# EAGLE board SparkFun_Tsunami_Qwiic-Panel_v22 (EAGLE 9.6.2), part 1 of 7
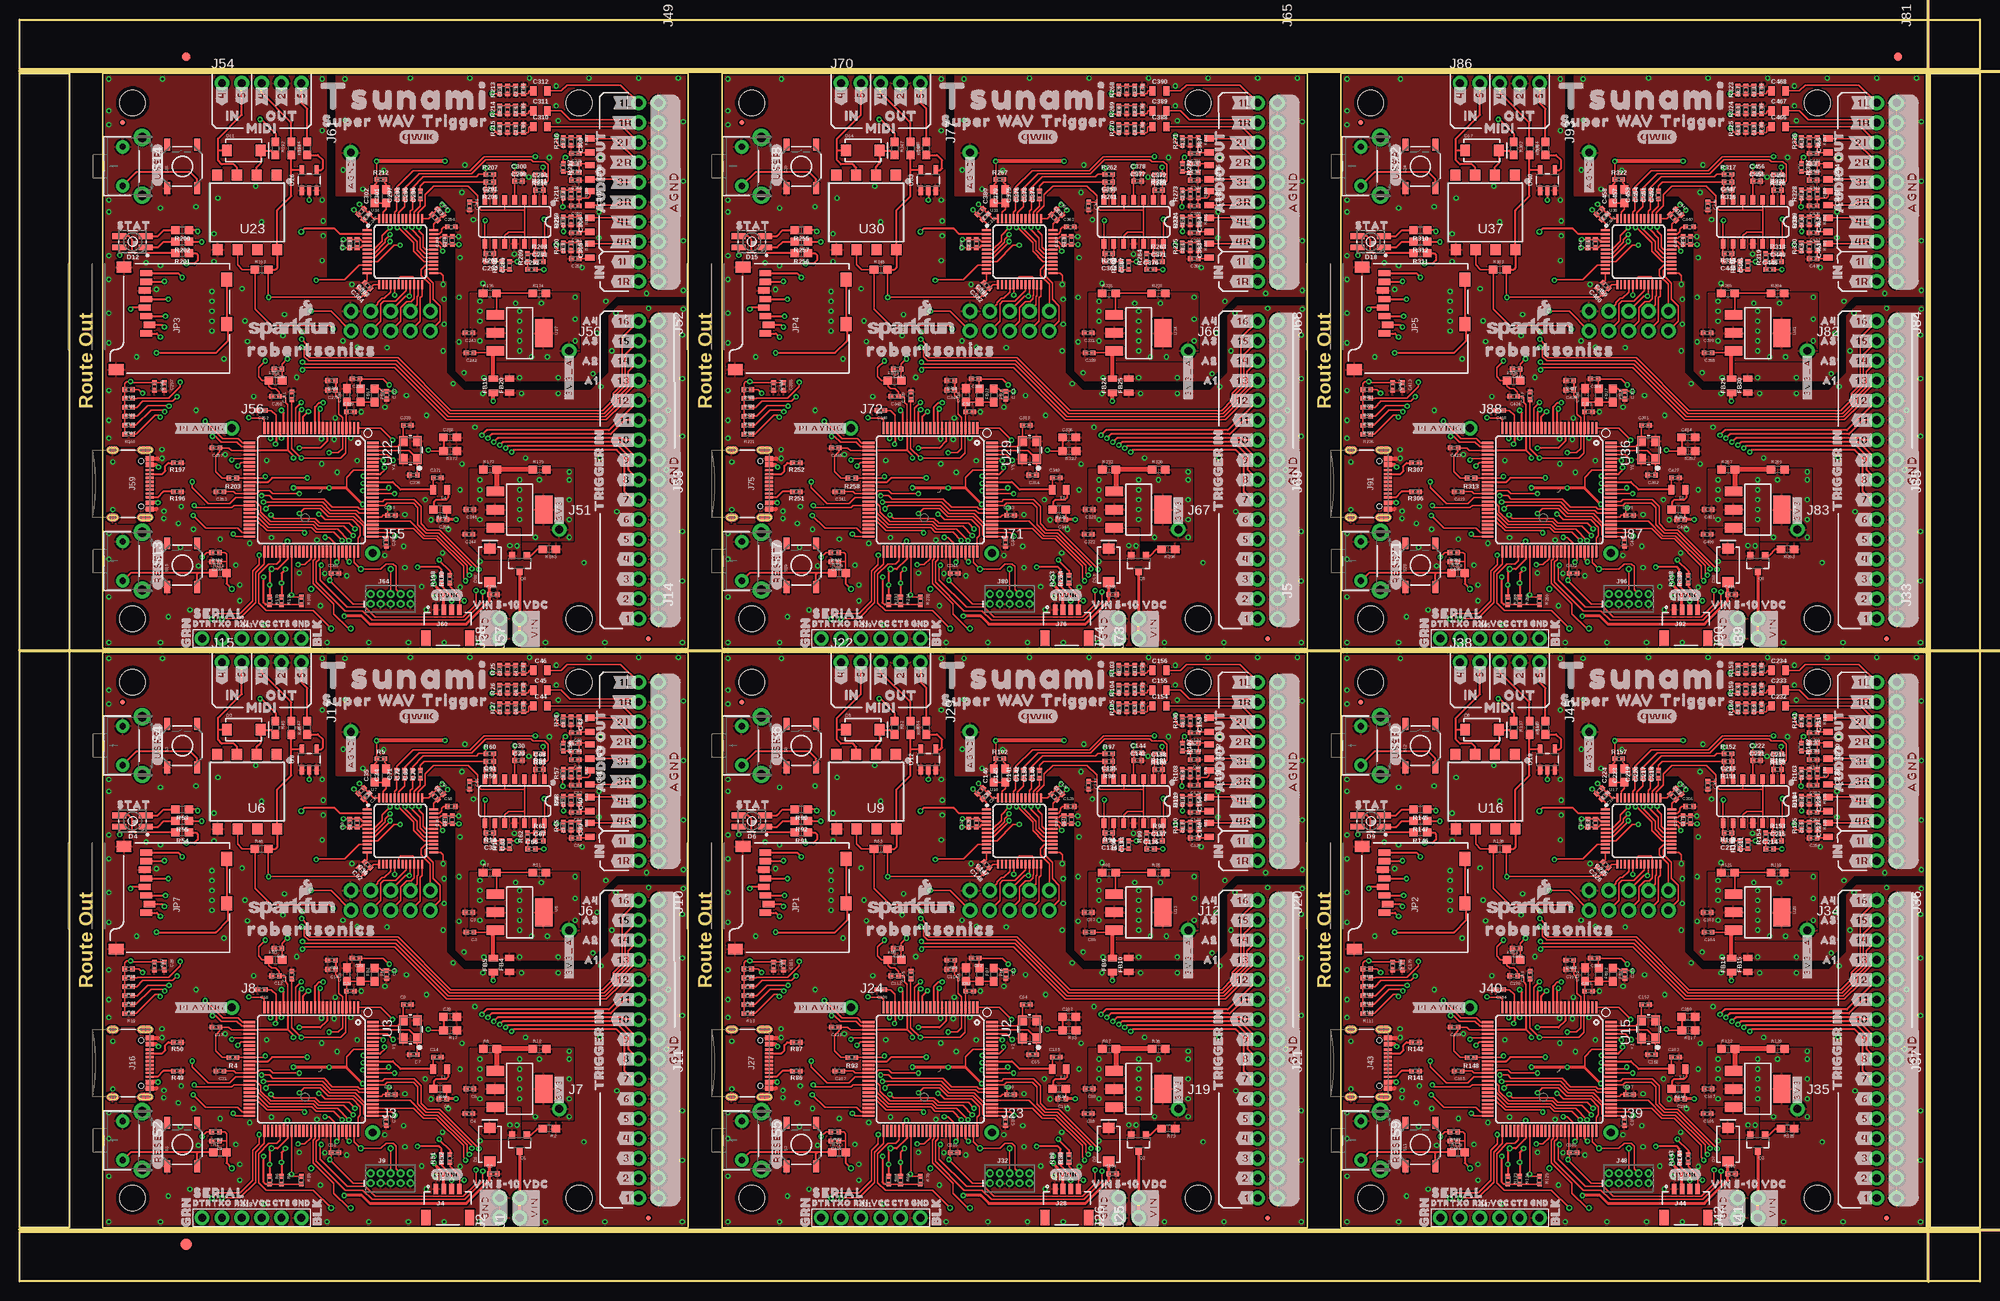
[diagram p0: board, top side]
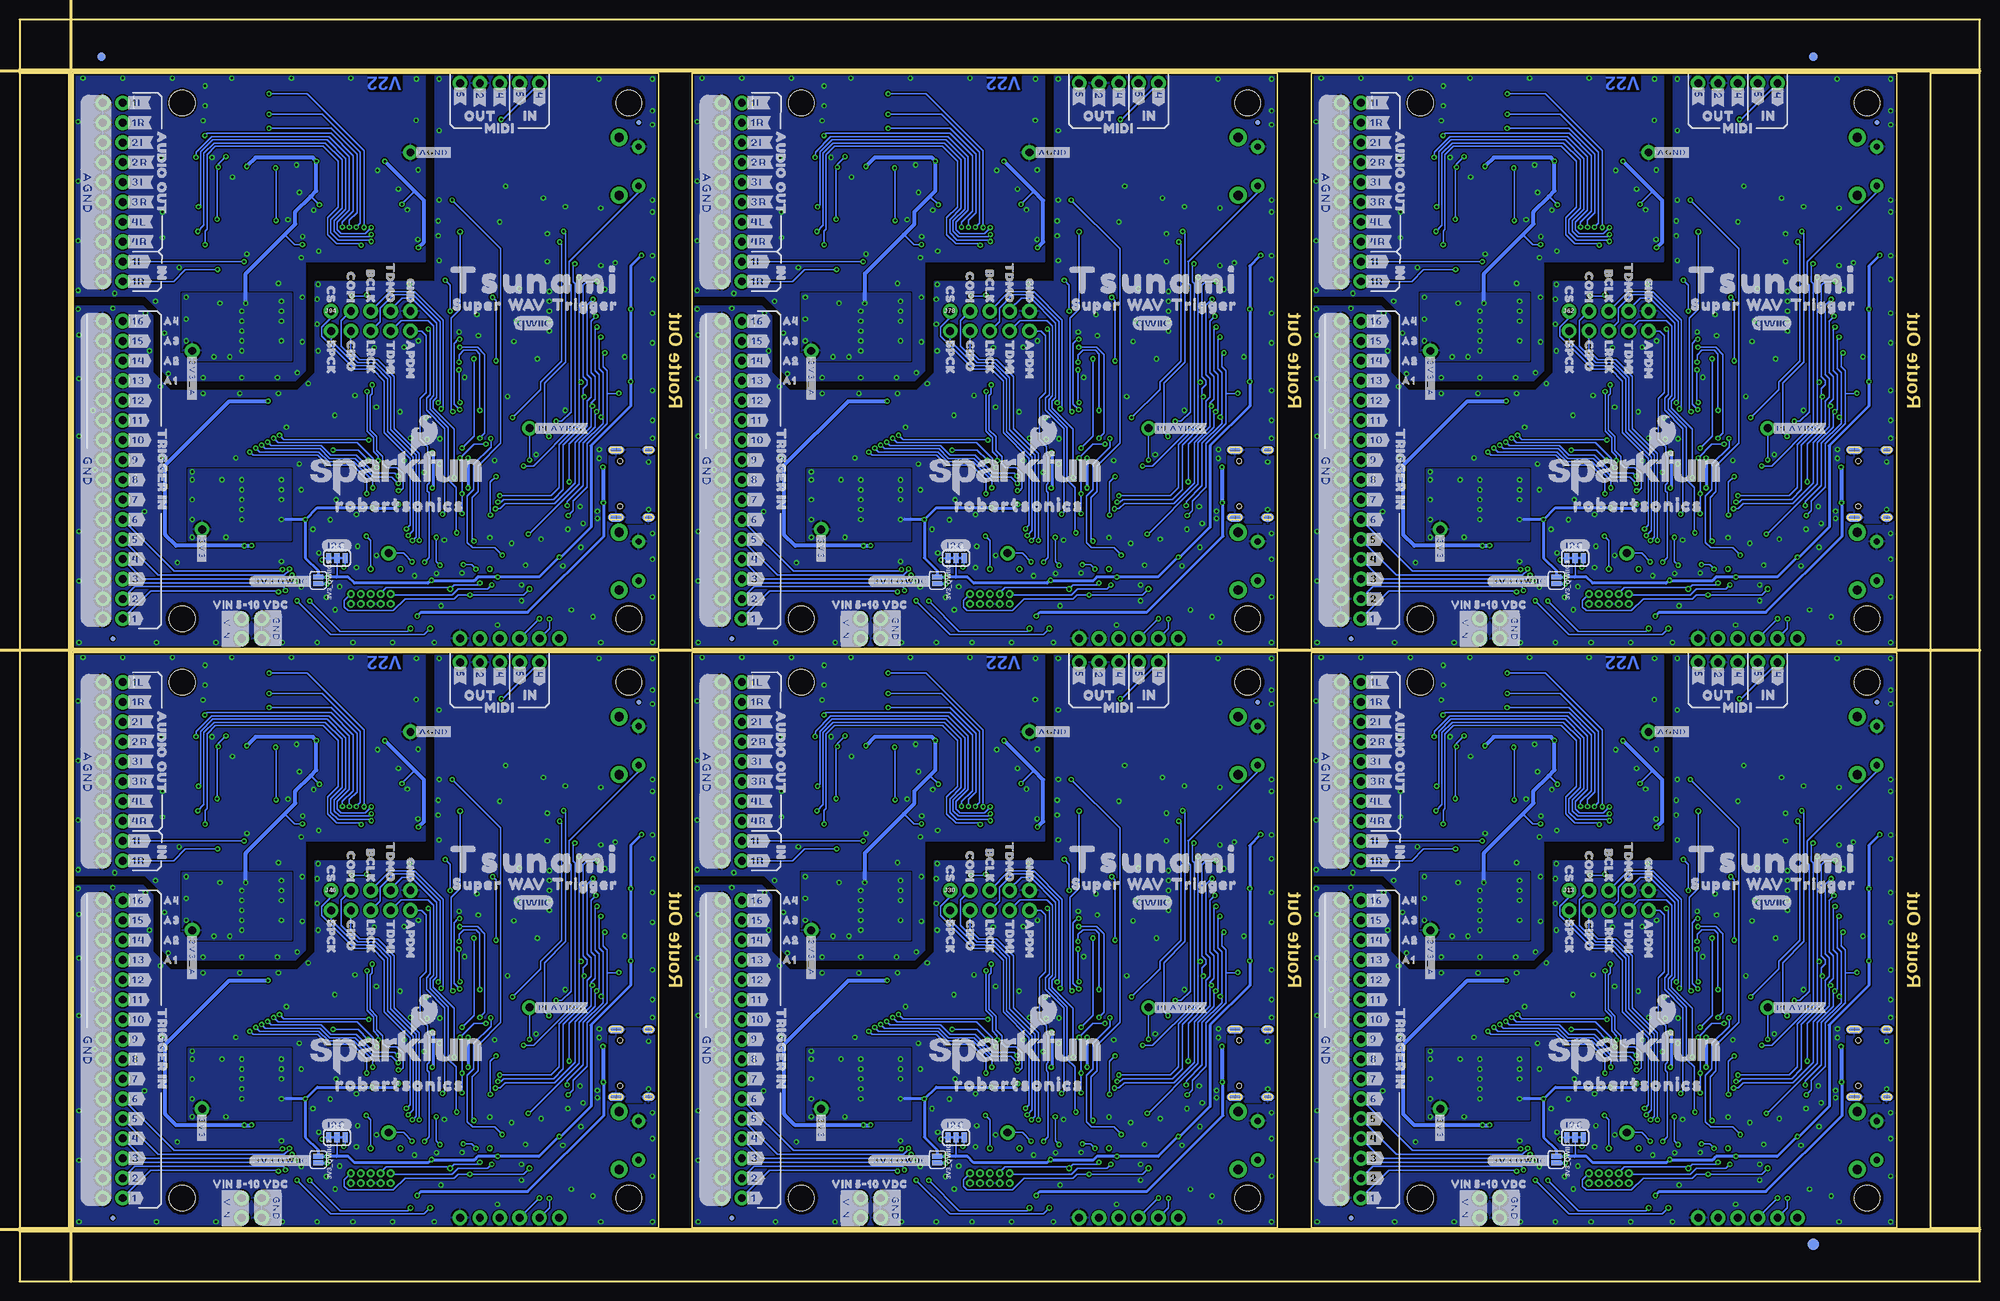
[diagram p1: board, bottom side, seen from below]

Size 250.95 x 161.54 mm. Coordinates in mm from the lower left corner, seen from the top.
Outline: 10.67,6.86 85.6,6.86 85.6,80.52 10.67,80.52 10.67,6.86
Outline: 89.92,6.86 164.85,6.86 164.85,80.52 89.92,80.52 89.92,6.86
Outline: 169.16,6.86 244.09,6.86 244.09,80.52 169.16,80.52 169.16,6.86
Outline: 10.67,81.03 85.6,81.03 85.6,154.69 10.67,154.69 10.67,81.03
Outline: 89.92,81.03 164.85,81.03 164.85,154.69 89.92,154.69 89.92,81.03
Outline: 169.16,81.03 244.09,81.03 244.09,154.69 169.16,154.69 169.16,81.03
Outline: 0,6.35 250.95,6.35 250.95,0 0,0 0,6.35
Outline: 244.6,154.69 250.95,154.69 250.95,6.86 244.6,6.86 244.6,154.69
Outline: 0,161.54 250.95,161.54 250.95,155.19 0,155.19 0,161.54
Outline: 0,154.69 6.35,154.69 6.35,6.86 0,6.86 0,154.69
Copper layers (1*16): Top 0.035mm / dielectric 1.5mm / Bottom 0.035mm
Design rules "SparkFun_Tsunami_Qwiic": minimum track width 7mil, minimum drill 0.3mm, track to track 7mil, track to pad 7mil, pad to pad 7mil, via to via 7mil, smd to smd 7mil, copper to edge 7mil, drill to drill 7mil, minimum pad ring 7mil, minimum via ring 7mil, stop-mask expansion 3mil, vias tented up to drill 25mil, thermal gap 10mil
tRestrict: area 40,34.7 to 40.1,35.4; area 40.5,34.7 to 40.6,35.4; area 119.3,34.7 to 119.4,35.4; area 119.8,34.7 to 119.9,35.4; area 198.5,34.7 to 198.6,35.4; area 199,34.7 to 199.1,35.4; area 40,108.8 to 40.1,109.6; area 40.5,108.8 to 40.6,109.6; area 119.3,108.8 to 119.4,109.6; area 119.8,108.8 to 119.9,109.6; area 198.5,108.8 to 198.6,109.6; area 199,108.8 to 199.1,109.6
Milling: 4 lines

## Footprints (pad centres in the part's own frame; a part is rotated, then mirrored left to right if it is on the bottom)
SMT-JUMPER_2_NO_SILK = smd 0.635 x 1.27: 1 -0.406,0; 2 0.406,0
0402-TIGHT = smd 0.6 x 0.6: 1 -0.5,0; 2 0.5,0
0603 = smd 1.1 x 1: 1 -0.85,0; 2 0.85,0
0805 = smd 0.8 x 1.2: 1 -0.9,0; 2 0.9,0
SMA-DIODE = smd 1.27 x 1.47: A -2.15,0; C 2.15,0
P-LCC-4-3 = smd 1.8 x 0.75: 1 -1.7,0.725; 2 -1.7,-0.725; 3 1.7,-0.725; 4 1.7,0.725
FIDUCIAL-1X2 = smd 1 x 1: 1 0,0
FIDUCIAL-1.5X3 = smd 1.5 x 1.5: 1 0,0
FIDUCIAL-MICRO = smd 0.635 x 0.635: 1 0,0
STAND-OFF = hole 3.302: 0,0
SMT-JUMPER_3_2-NC_TRACE_SILK = smd 0.66 x 1.27: 1 -1.041,0; 2 0,0; 3 1.041,0
1X02_NO_SILK = drill 1.016 pad 1.88: 1 0,0; 2 2.54,0
1X01_NO_SILK = drill 1.016 pad 1.88: 1 0,0
JST04_1MM_RA = smd 0.6 x 1.35: 1 -1.5,0; 2 -0.5,0; 3 0.5,0; 4 1.5,0 | smd 1.2 x 2: NC1 2.8,-3.675; NC2 -2.8,-3.675
2X10_NOSILK = drill 1.016 pad 1.88: 1 0,0; 2 0,2.54; 3 2.54,0; 4 2.54,2.54; 5 5.08,0; 6 5.08,2.54; 7 7.62,0; 8 7.62,2.54; 9 10.16,0; 10 10.16,2.54; 11 12.7,0; 12 12.7,2.54; 13 15.24,0; 14 15.24,2.54; 15 17.78,0; 16 17.78,2.54; 17 20.32,0; 18 20.32,2.54; 19 22.86,0; 20 22.86,2.54
2X5-PTH-1.27MM-NO_SILK = drill 0.508 pad 1: 1 -2.54,-0.635; 2 -2.54,0.635; 3 -1.27,-0.635; 4 -1.27,0.635; 5 0,-0.635; 6 0,0.635; 7 1.27,-0.635; 8 1.27,0.635; 9 2.54,-0.635; 10 2.54,0.635
2X8_NOSILK = drill 1.016 pad 1.88: 1 0,0; 2 0,2.54; 3 2.54,0; 4 2.54,2.54; 5 5.08,0; 6 5.08,2.54; 7 7.62,0; 8 7.62,2.54; 9 10.16,0; 10 10.16,2.54; 11 12.7,0; 12 12.7,2.54; 13 15.24,0; 14 15.24,2.54; 15 17.78,0; 16 17.78,2.54
2X5_NOSILK = drill 1.016 pad 1.88: 1 0,0; 2 0,2.54; 3 2.54,0; 4 2.54,2.54; 5 5.08,0; 6 5.08,2.54; 7 7.62,0; 8 7.62,2.54; 9 10.16,0; 10 10.16,2.54
1X05_NO_SILK = drill 1.016 pad 1.88: 1 0,0; 2 2.54,0; 3 5.08,0; 4 7.62,0; 5 10.16,0
USB-C-16P-4LAYER-ISOLATED = smd 0.3 x 1: A5 -1.25,-0.34; A6 -0.25,-0.34; A7 0.25,-0.34; A8 1.25,-0.34; B5 1.75,-0.34; B6 0.75,-0.34; B7 -0.75,-0.34; B8 -1.75,-0.34 | smd 0.6 x 1: GND -3.225,-0.34; GND2 3.225,-0.34; VBUS1 -2.45,-0.34; VBUS2 2.45,-0.34 | smd 1 x 2.1: SHLD1 -4.32,-0.915; SHLD2 4.32,-0.915 | smd 1 x 2.1 bottom: SHLD3 -4.32,-0.915; SHLD4 4.32,-0.915 | smd 1 x 1.6: SHLD5 -4.32,-5.095; SHLD8 4.32,-5.095 | smd 1 x 1.6 bottom: SHLD6 -4.32,-5.095; SHLD7 4.32,-5.095 | hole 0.65: -2.89,-1.445; 2.89,-1.445
6_PIN_SERIAL_TARGET_SIDE_W_SILK = drill 1.016 pad 1.88: 1 -6.35,0; 2 -3.81,0; 3 -1.27,0; 4 1.27,0; 5 3.81,0; 6 6.35,0
MICRO-SD-SOCKET-PP = smd 1.8 x 1.4: CD1 -2.05,0.4; CD2 -7.75,0.4 | smd 0.8 x 1.5: CS -7.84,10.3; DI -6.74,10.7; DO -2.34,10.7; GND -3.44,10.9; RSV1 -8.94,10.7; RSV2 -1.24,10.7; SCLK -4.54,10.7; VCC -5.64,10.9 | smd 1.4 x 1.9: GND1 -13.6,14.55; GND3 -0.45,13.55
SOT23-3 = smd 0.8 x 0.9: 1 -0.95,-1; 2 0.95,-1; 3 0,1.1
TACTILE_SWITCH_SMD_5.2MM = smd 1.524 x 0.762: 1 -2.794,1.905; 2 2.794,1.905; 3 -2.794,-1.905; 4 2.794,-1.905
TACTILE_SWITCH_PTH_RIGHT_ANGLE = drill 0.8 pad 1.7: 1 -2.5,0; 2 2.5,0 | drill 1.2 pad 2.2: ANCHOR1 -3.703,2.5; ANCHOR2 3.703,2.5
TP_15TH = drill 0.381 pad 0.61: 1 0,0
SOT223 = smd 1.219 x 2.235: 1 -2.311,-3.099; 2 0,-3.099; 3 2.311,-3.099 | smd 3.6 x 2.2: 4 0,3.099
LQFP100 = smd 1.5 x 0.28: 1 -7.9,6; 2 -7.9,5.5; 3 -7.9,5; 4 -7.9,4.5; 5 -7.9,4; 6 -7.9,3.5; 7 -7.9,3; 8 -7.9,2.5; 9 -7.9,2; 10 -7.9,1.5; 11 -7.9,1; 12 -7.9,0.5; 13 -7.9,0; 14 -7.9,-0.5; 15 -7.9,-1; 16 -7.9,-1.5; 17 -7.9,-2; 18 -7.9,-2.5; 19 -7.9,-3; 20 -7.9,-3.5; 21 -7.9,-4; 22 -7.9,-4.5; 23 -7.9,-5; 24 -7.9,-5.5; 25 -7.9,-6; 51 7.9,-6; 52 7.9,-5.5; 53 7.9,-5; 54 7.9,-4.5; 55 7.9,-4; 56 7.9,-3.5; 57 7.9,-3; 58 7.9,-2.5; 59 7.9,-2; 60 7.9,-1.5; 61 7.9,-1; 62 7.9,-0.5; 63 7.9,0; 64 7.9,0.5; 65 7.9,1; 66 7.9,1.5; 67 7.9,2; 68 7.9,2.5; 69 7.9,3; 70 7.9,3.5; 71 7.9,4; 72 7.9,4.5; 73 7.9,5; 74 7.9,5.5; 75 7.9,6 | smd 0.28 x 1.5: 26 -6,-7.9; 27 -5.5,-7.9; 28 -5,-7.9; 29 -4.5,-7.9; 30 -4,-7.9; 31 -3.5,-7.9; 32 -3,-7.9; 33 -2.5,-7.9; 34 -2,-7.9; 35 -1.5,-7.9; 36 -1,-7.9; 37 -0.5,-7.9; 38 0,-7.9; 39 0.5,-7.9; 40 1,-7.9; 41 1.5,-7.9; 42 2,-7.9; 43 2.5,-7.9; 44 3,-7.9; 45 3.5,-7.9; 46 4,-7.9; 47 4.5,-7.9; 48 5,-7.9; 49 5.5,-7.9; 50 6,-7.9; 76 6,7.9; 77 5.5,7.9; 78 5,7.9; 79 4.5,7.9; 80 4,7.9; 81 3.5,7.9; 82 3,7.9; 83 2.5,7.9; 84 2,7.9; 85 1.5,7.9; 86 1,7.9; 87 0.5,7.9; 88 0,7.9; 89 -0.5,7.9; 90 -1,7.9; 91 -1.5,7.9; 92 -2,7.9; 93 -2.5,7.9; 94 -3,7.9; 95 -3.5,7.9; 96 -4,7.9; 97 -4.5,7.9; 98 -5,7.9; 99 -5.5,7.9; 100 -6,7.9
SO14 = smd 0.6 x 1.2: 1 -3.175,-2.8; 2 -1.905,-2.8; 3 -0.635,-2.8; 4 0.635,-2.8; 5 1.905,-2.8; 6 3.175,-2.8; 7 4.445,-2.8; 8 4.445,2.8; 9 3.175,2.8; 10 1.905,2.8; 11 0.635,2.8; 12 -0.635,2.8; 13 -1.905,2.8; 14 -3.175,2.8
8-SMD = smd 1.3 x 1.4: 1 -3.96,-4.96; 2 -1.42,-4.96; 3 1.12,-4.96; 4 3.66,-4.96; 5 3.59,4.58; 6 1.05,4.58; 7 -1.49,4.58; 8 -4.03,4.58
LQFP-48 = smd 1.143 x 0.254: 1 -4.25,2.75; 2 -4.25,2.25; 3 -4.25,1.75; 4 -4.25,1.25; 5 -4.25,0.75; 6 -4.25,0.25; 7 -4.25,-0.25; 8 -4.25,-0.75; 9 -4.25,-1.25; 10 -4.25,-1.75; 11 -4.25,-2.25; 12 -4.25,-2.75; 25 4.25,-2.75; 26 4.25,-2.25; 27 4.25,-1.75; 28 4.25,-1.25; 29 4.25,-0.75; 30 4.25,-0.25; 31 4.25,0.25; 32 4.25,0.75; 33 4.25,1.25; 34 4.25,1.75; 35 4.25,2.25; 36 4.25,2.75 | smd 0.254 x 1.143: 13 -2.75,-4.25; 14 -2.25,-4.25; 15 -1.75,-4.25; 16 -1.25,-4.25; 17 -0.75,-4.25; 18 -0.25,-4.25; 19 0.25,-4.25; 20 0.75,-4.25; 21 1.25,-4.25; 22 1.75,-4.25; 23 2.25,-4.25; 24 2.75,-4.25; 37 2.75,4.25; 38 2.25,4.25; 39 1.75,4.25; 40 1.25,4.25; 41 0.75,4.25; 42 0.25,4.25; 43 -0.25,4.25; 44 -0.75,4.25; 45 -1.25,4.25; 46 -1.75,4.25; 47 -2.25,4.25; 48 -2.75,4.25
SOT23-5 = smd 0.55 x 1.2: 1 -0.95,-1.3; 2 0,-1.3; 3 0.95,-1.3; 4 0.95,1.3; 5 -0.95,1.3
CRYSTAL-SMD-3.2X2.5MM_GEYER_12.60421 = smd 1.3 x 1.1: 1 -1.15,-0.9; 2 1.15,-0.9; 3 1.15,0.9; 4 -1.15,0.9

## Placement (x,y rotation side)
3V3_QWIIC  [SMT-JUMPER_2_NO_SILK]  54.23,15.61 270 bottom
3V3_QWIIC1  [SMT-JUMPER_2_NO_SILK]  133.48,15.61 270 bottom
3V3_QWIIC2  [SMT-JUMPER_2_NO_SILK]  212.73,15.61 270 bottom
3V3_QWIIC3  [SMT-JUMPER_2_NO_SILK]  54.23,89.77 270 bottom
3V3_QWIIC4  [SMT-JUMPER_2_NO_SILK]  133.48,89.77 270 bottom
3V3_QWIIC5  [SMT-JUMPER_2_NO_SILK]  212.73,89.77 270 bottom
C1  10nF  [0402-TIGHT]  25.1,17.97 180 top
C2  10uF  [0402-TIGHT]  60.69,13.77 0 top
C3  0.1uF  [0402-TIGHT]  57.66,44.7 180 top
C4  0.1uF  [0402-TIGHT]  57.53,21.46 180 top
C5  10uF  [0402-TIGHT]  57.53,47.24 180 top
C6  10uF  [0402-TIGHT]  57.66,24.64 180 top
C7  12pF  [0402-TIGHT]  50.42,29.05 180 top
C8  0.1uF  [0402-TIGHT]  54.16,23.36 180 top
C9  12pF  [0402-TIGHT]  49.63,35.42 0 top
C10  0.1uF  [0402-TIGHT]  39.94,39.94 180 top
C11  10uF  [0402-TIGHT]  39.95,41.14 180 top
C12  0.1uF  [0402-TIGHT]  32.77,39.12 180 top
C13  0.1uF  [0402-TIGHT]  25.15,32.54 180 top
C14  4.7uF  [0402-TIGHT]  53.47,28.7 0 top
C15  0.1uF  [0402-TIGHT]  40.39,16.49 0 top
C16  0.1uF  [0402-TIGHT]  47.62,23.91 0 top
C17  0.1uF  [0402-TIGHT]  34.86,39.23 90 top
C18  0.1uF  [0402-TIGHT]  30.99,37.34 180 top
C19  0.1uF  [0402-TIGHT]  47.01,39.29 270 top
C20  10pF  [0603]  55.12,33.88 0 top
C21  0.1uF  [0402-TIGHT]  25.65,26.92 180 top
C22  0.1uF  [0402-TIGHT]  46.95,20.44 270 top
C23  0.1uF  [0402-TIGHT]  43.08,41.37 180 top
C24  0.1uF  [0402-TIGHT]  42.36,37.17 0 top
C25  2.2uF  [0603]  41.91,39.28 90 top
C26  0.1uF  [0402-TIGHT]  33.11,42.62 180 top
C27  10uF  [0402-TIGHT]  17.27,40.39 270 top
C28  0.1uF  [0402-TIGHT]  18.54,40.39 270 top
C29  0.1uF  [0402-TIGHT]  63.88,66.67 0 top
C30  1.0uF  [0402-TIGHT]  63.88,67.69 0 top
C31  0.1uF  [0402-TIGHT]  54.46,59.11 90 top
C32  1.0uF  [0402-TIGHT]  55.4,59.11 90 top
C33  100pF  [0402-TIGHT]  60.2,56.39 180 top
C34  5.6nF  [0603]  46.94,64.74 90 top
C35  390nF  [0603]  45.47,64.74 90 top
C36  0.1uF  [0402-TIGHT]  44.55,53.31 135 top
C37  0.1uF  [0402-TIGHT]  44.4,62.12 225 top
C38  1.0uF  [0402-TIGHT]  43.74,62.79 225 top
C39  22uF  [0805]  73.03,57.78 90 top
C40  22uF  [0805]  73.03,61.09 90 top
C41  22uF  [0805]  73.03,64.52 270 top
C42  22uF  [0805]  73.03,67.82 270 top
C43  22uF  [0805]  73.03,71.25 90 top
C44  22uF  [0805]  66.67,73.66 0 top
C45  22uF  [0805]  66.67,75.69 0 top
C46  22uF  [0805]  66.67,78.23 0 top
C47  0.1uF  [0402-TIGHT]  64.52,78.36 90 top
C48  0.1uF  [0402-TIGHT]  64.52,75.82 90 top
C49  0.1uF  [0402-TIGHT]  64.52,73.41 90 top
C50  0.1uF  [0402-TIGHT]  71.12,70.23 180 top
C51  0.1uF  [0402-TIGHT]  71.13,68.92 180 top
C52  0.1uF  [0402-TIGHT]  71.12,63.5 180 top
C53  0.1uF  [0402-TIGHT]  71.12,60.07 180 top
C54  0.1uF  [0402-TIGHT]  71.12,56.77 180 top
C55  0.1uF  [0402-TIGHT]  57.61,63.49 270 top
C56  0.1uF  [0402-TIGHT]  55.28,60.81 0 top
C57  0.1uF  [0402-TIGHT]  43.23,58.68 90 top
C58  1.0uF  [0402-TIGHT]  53.87,62.71 315 top
C59  0.1uF  [0402-TIGHT]  53.17,62.03 315 top
C60  1.0uF  [0402-TIGHT]  42.27,58.68 90 top
C61  100pF  [0402-TIGHT]  60.2,66.55 180 top
C62  1.0uF  [0402-TIGHT]  43.81,52.6 135 top
C63  1.0uF  [0402-TIGHT]  62.74,55.88 90 top
C64  12pF  [0402-TIGHT]  128.88,35.42 0 top
C65  12pF  [0402-TIGHT]  129.67,29.05 180 top
C66  1.0uF  [0402-TIGHT]  65.53,55.37 0 top
C67  100pF  [0402-TIGHT]  66.55,56.39 0 top
C68  100pF  [0402-TIGHT]  66.55,66.55 0 top
C69  1.0uF  [0402-TIGHT]  50.29,64.9 90 top
C70  1.0uF  [0402-TIGHT]  51.31,64.9 90 top
C71  1.0uF  [0402-TIGHT]  48.26,64.9 90 top
C72  1.0uF  [0402-TIGHT]  49.28,64.9 90 top
C73  0.1uF  [0402-TIGHT]  70.61,61.59 90 top
C74  0.1uF  [0402-TIGHT]  70.61,58.29 90 top
C75  0.1uF  [0402-TIGHT]  62.48,78.36 90 top
C76  0.1uF  [0402-TIGHT]  62.48,75.82 90 top
C77  0.1uF  [0402-TIGHT]  62.48,73.41 90 top
C78  0.1uF  [0402-TIGHT]  70.61,71.76 90 top
C79  0.1uF  [0402-TIGHT]  71.12,66.8 180 top
C80  0.1uF  [0402-TIGHT]  70.61,65.02 90 top
C81  0.1uF  [0402-TIGHT]  126.25,39.29 270 top
C82  0.1uF  [0402-TIGHT]  122.32,41.37 180 top
C83  0.1uF  [0402-TIGHT]  121.61,37.17 0 top
C84  2.2uF  [0603]  121.16,39.28 90 top
C85  10uF  [0402-TIGHT]  119.2,41.14 180 top
C86  0.1uF  [0402-TIGHT]  136.91,44.7 180 top
C87  10uF  [0402-TIGHT]  136.78,47.24 180 top
C88  0.1uF  [0402-TIGHT]  136.78,21.46 180 top
C89  10uF  [0402-TIGHT]  136.91,24.64 180 top
C90  10uF  [0402-TIGHT]  96.52,40.39 270 top
C91  0.1uF  [0402-TIGHT]  123.65,62.12 225 top
C92  1.0uF  [0402-TIGHT]  122.99,62.79 225 top
C93  0.1uF  [0402-TIGHT]  133.71,59.11 90 top
C94  1.0uF  [0402-TIGHT]  134.65,59.11 90 top
C95  0.1uF  [0402-TIGHT]  141.73,78.36 90 top
C96  0.1uF  [0402-TIGHT]  141.73,75.82 90 top
C97  0.1uF  [0402-TIGHT]  141.73,73.41 90 top
C98  0.1uF  [0402-TIGHT]  149.86,71.76 90 top
C99  0.1uF  [0402-TIGHT]  150.37,66.8 180 top
C100  0.1uF  [0402-TIGHT]  149.86,65.02 90 top
C101  0.1uF  [0402-TIGHT]  97.79,40.39 270 top
C102  10pF  [0603]  134.36,33.88 0 top
C103  0.1uF  [0402-TIGHT]  112.36,42.62 180 top
C104  10uF  [0402-TIGHT]  139.93,13.77 0 top
C105  0.1uF  [0402-TIGHT]  114.11,39.23 90 top
C106  0.1uF  [0402-TIGHT]  110.24,37.34 180 top
C107  0.1uF  [0402-TIGHT]  104.9,26.92 180 top
C108  0.1uF  [0402-TIGHT]  126.2,20.44 270 top
C109  0.1uF  [0402-TIGHT]  126.87,23.91 0 top
C110  0.1uF  [0402-TIGHT]  119.64,16.49 0 top
C111  0.1uF  [0402-TIGHT]  104.4,32.54 180 top
C112  0.1uF  [0402-TIGHT]  112.01,39.12 180 top
C113  0.1uF  [0402-TIGHT]  133.41,23.36 180 top
C114  0.1uF  [0402-TIGHT]  119.19,39.94 180 top
C115  4.7uF  [0402-TIGHT]  132.72,28.7 0 top
C116  10nF  [0402-TIGHT]  104.35,17.97 180 top
C117  0.1uF  [0402-TIGHT]  149.86,58.29 90 top
C118  0.1uF  [0402-TIGHT]  149.86,61.59 90 top
C119  0.1uF  [0402-TIGHT]  143.76,78.36 90 top
C120  0.1uF  [0402-TIGHT]  143.76,75.82 90 top
C121  0.1uF  [0402-TIGHT]  143.76,73.41 90 top
C122  0.1uF  [0402-TIGHT]  150.37,70.23 180 top
C123  0.1uF  [0402-TIGHT]  150.38,68.92 180 top
C124  0.1uF  [0402-TIGHT]  150.37,63.5 180 top
C125  0.1uF  [0402-TIGHT]  150.37,60.07 180 top
C126  0.1uF  [0402-TIGHT]  150.37,56.77 180 top
C127  0.1uF  [0402-TIGHT]  136.86,63.49 270 top
C128  0.1uF  [0402-TIGHT]  134.53,60.81 0 top
C129  0.1uF  [0402-TIGHT]  122.48,58.68 90 top
C130  1.0uF  [0402-TIGHT]  133.12,62.71 315 top
C131  0.1uF  [0402-TIGHT]  132.42,62.03 315 top
C132  1.0uF  [0402-TIGHT]  121.51,58.68 90 top
C133  1.0uF  [0402-TIGHT]  141.99,55.88 90 top
C134  100pF  [0402-TIGHT]  139.45,56.39 180 top
C135  100pF  [0402-TIGHT]  139.45,66.55 180 top
C136  1.0uF  [0402-TIGHT]  144.78,55.37 0 top
C137  100pF  [0402-TIGHT]  145.8,56.39 0 top
C138  100pF  [0402-TIGHT]  145.8,66.55 0 top
C139  1.0uF  [0402-TIGHT]  129.54,64.9 90 top
C140  1.0uF  [0402-TIGHT]  130.56,64.9 90 top
C141  1.0uF  [0402-TIGHT]  127.51,64.9 90 top
C142  1.0uF  [0402-TIGHT]  128.52,64.9 90 top
C143  0.1uF  [0402-TIGHT]  143.13,66.67 0 top
C144  1.0uF  [0402-TIGHT]  143.13,67.69 0 top
C145  5.6nF  [0603]  126.19,64.74 90 top
C146  390nF  [0603]  124.71,64.74 90 top
C147  0.1uF  [0402-TIGHT]  123.8,53.31 135 top
C148  1.0uF  [0402-TIGHT]  123.06,52.6 135 top
C149  22uF  [0805]  152.27,57.78 90 top
C150  22uF  [0805]  152.27,61.09 90 top
C151  22uF  [0805]  152.27,64.52 270 top
C152  22uF  [0805]  152.27,67.82 270 top
C153  22uF  [0805]  152.27,71.25 90 top
C154  22uF  [0805]  145.92,73.66 0 top
C155  22uF  [0805]  145.92,75.69 0 top
C156  22uF  [0805]  145.92,78.23 0 top
C157  12pF  [0402-TIGHT]  208.13,35.42 0 top
C158  12pF  [0402-TIGHT]  208.92,29.05 180 top
C159  0.1uF  [0402-TIGHT]  205.5,39.29 270 top
C160  0.1uF  [0402-TIGHT]  201.57,41.37 180 top
C161  0.1uF  [0402-TIGHT]  200.86,37.17 0 top
C162  2.2uF  [0603]  200.41,39.28 90 top
C163  10uF  [0402-TIGHT]  198.45,41.14 180 top
C164  0.1uF  [0402-TIGHT]  216.15,44.7 180 top
C165  10uF  [0402-TIGHT]  216.03,47.24 180 top
C166  0.1uF  [0402-TIGHT]  216.03,21.46 180 top
C167  10uF  [0402-TIGHT]  216.15,24.64 180 top
C168  10uF  [0402-TIGHT]  175.77,40.39 270 top
C169  0.1uF  [0402-TIGHT]  202.9,62.12 225 top
C170  1.0uF  [0402-TIGHT]  202.23,62.79 225 top
C171  0.1uF  [0402-TIGHT]  212.95,59.11 90 top
C172  1.0uF  [0402-TIGHT]  213.89,59.11 90 top
C173  0.1uF  [0402-TIGHT]  220.98,78.36 90 top
C174  0.1uF  [0402-TIGHT]  220.98,75.82 90 top
C175  0.1uF  [0402-TIGHT]  220.98,73.41 90 top
C176  0.1uF  [0402-TIGHT]  229.11,71.76 90 top
C177  0.1uF  [0402-TIGHT]  229.62,66.8 180 top
C178  0.1uF  [0402-TIGHT]  229.11,65.02 90 top
C179  0.1uF  [0402-TIGHT]  177.04,40.39 270 top
C180  10pF  [0603]  213.61,33.88 0 top
C181  0.1uF  [0402-TIGHT]  191.6,42.62 180 top
C182  10uF  [0402-TIGHT]  219.18,13.77 0 top
C183  0.1uF  [0402-TIGHT]  193.35,39.23 90 top
C184  0.1uF  [0402-TIGHT]  189.48,37.34 180 top
C185  0.1uF  [0402-TIGHT]  184.15,26.92 180 top
C186  0.1uF  [0402-TIGHT]  205.45,20.44 270 top
C187  0.1uF  [0402-TIGHT]  206.12,23.91 0 top
C188  0.1uF  [0402-TIGHT]  198.89,16.49 0 top
C189  0.1uF  [0402-TIGHT]  183.64,32.54 180 top
C190  0.1uF  [0402-TIGHT]  191.26,39.12 180 top
C191  0.1uF  [0402-TIGHT]  212.66,23.36 180 top
C192  0.1uF  [0402-TIGHT]  198.44,39.94 180 top
C193  4.7uF  [0402-TIGHT]  211.97,28.7 0 top
C194  10nF  [0402-TIGHT]  183.6,17.97 180 top
C195  0.1uF  [0402-TIGHT]  229.11,58.29 90 top
C196  0.1uF  [0402-TIGHT]  229.11,61.59 90 top
C197  0.1uF  [0402-TIGHT]  223.01,78.36 90 top
C198  0.1uF  [0402-TIGHT]  223.01,75.82 90 top
C199  0.1uF  [0402-TIGHT]  223.01,73.41 90 top
C200  0.1uF  [0402-TIGHT]  229.62,70.23 180 top
C201  0.1uF  [0402-TIGHT]  229.63,68.92 180 top
C202  0.1uF  [0402-TIGHT]  229.62,63.5 180 top
C203  0.1uF  [0402-TIGHT]  229.62,60.07 180 top
C204  0.1uF  [0402-TIGHT]  229.62,56.77 180 top
C205  0.1uF  [0402-TIGHT]  216.1,63.49 270 top
C206  0.1uF  [0402-TIGHT]  213.77,60.81 0 top
C207  0.1uF  [0402-TIGHT]  201.73,58.68 90 top
C208  1.0uF  [0402-TIGHT]  212.36,62.71 315 top
C209  0.1uF  [0402-TIGHT]  211.67,62.03 315 top
C210  1.0uF  [0402-TIGHT]  200.76,58.68 90 top
C211  1.0uF  [0402-TIGHT]  221.23,55.88 90 top
C212  100pF  [0402-TIGHT]  218.69,56.39 180 top
C213  100pF  [0402-TIGHT]  218.69,66.55 180 top
C214  1.0uF  [0402-TIGHT]  224.03,55.37 0 top
C215  100pF  [0402-TIGHT]  225.04,56.39 0 top
C216  100pF  [0402-TIGHT]  225.04,66.55 0 top
C217  1.0uF  [0402-TIGHT]  208.79,64.9 90 top
C218  1.0uF  [0402-TIGHT]  209.8,64.9 90 top
C219  1.0uF  [0402-TIGHT]  206.76,64.9 90 top
C220  1.0uF  [0402-TIGHT]  207.77,64.9 90 top
C221  0.1uF  [0402-TIGHT]  222.38,66.67 0 top
C222  1.0uF  [0402-TIGHT]  222.38,67.69 0 top
C223  5.6nF  [0603]  205.44,64.74 90 top
C224  390nF  [0603]  203.96,64.74 90 top
C225  0.1uF  [0402-TIGHT]  203.05,53.31 135 top
C226  1.0uF  [0402-TIGHT]  202.31,52.6 135 top
C227  22uF  [0805]  231.52,57.78 90 top
C228  22uF  [0805]  231.52,61.09 90 top
C229  22uF  [0805]  231.52,64.52 270 top
C230  22uF  [0805]  231.52,67.82 270 top
C231  22uF  [0805]  231.52,71.25 90 top
C232  22uF  [0805]  225.17,73.66 0 top
C233  22uF  [0805]  225.17,75.69 0 top
C234  22uF  [0805]  225.17,78.23 0 top
C235  12pF  [0402-TIGHT]  49.63,109.59 0 top
C236  12pF  [0402-TIGHT]  50.42,103.22 180 top
C237  0.1uF  [0402-TIGHT]  47.01,113.45 270 top
C238  0.1uF  [0402-TIGHT]  43.08,115.54 180 top
C239  0.1uF  [0402-TIGHT]  42.36,111.33 0 top
C240  2.2uF  [0603]  41.91,113.45 90 top
C241  10uF  [0402-TIGHT]  39.95,115.31 180 top
C242  0.1uF  [0402-TIGHT]  57.66,118.87 180 top
C243  10uF  [0402-TIGHT]  57.53,121.41 180 top
C244  0.1uF  [0402-TIGHT]  57.53,95.63 180 top
C245  10uF  [0402-TIGHT]  57.66,98.81 180 top
C246  10uF  [0402-TIGHT]  17.27,114.55 270 top
C247  0.1uF  [0402-TIGHT]  44.4,136.29 225 top
C248  1.0uF  [0402-TIGHT]  43.74,136.96 225 top
C249  0.1uF  [0402-TIGHT]  54.46,133.27 90 top
C250  1.0uF  [0402-TIGHT]  55.4,133.27 90 top
C251  0.1uF  [0402-TIGHT]  62.48,152.53 90 top
C252  0.1uF  [0402-TIGHT]  62.48,149.99 90 top
C253  0.1uF  [0402-TIGHT]  62.48,147.57 90 top
C254  0.1uF  [0402-TIGHT]  70.61,145.92 90 top
C255  0.1uF  [0402-TIGHT]  71.12,140.97 180 top
C256  0.1uF  [0402-TIGHT]  70.61,139.19 90 top
C257  0.1uF  [0402-TIGHT]  18.54,114.55 270 top
C258  10pF  [0603]  55.12,108.04 0 top
C259  0.1uF  [0402-TIGHT]  33.11,116.78 180 top
C260  10uF  [0402-TIGHT]  60.69,87.94 0 top
C261  0.1uF  [0402-TIGHT]  34.86,113.4 90 top
C262  0.1uF  [0402-TIGHT]  30.99,111.51 180 top
C263  0.1uF  [0402-TIGHT]  25.65,101.09 180 top
C264  0.1uF  [0402-TIGHT]  46.95,94.61 270 top
C265  0.1uF  [0402-TIGHT]  47.62,98.08 0 top
C266  0.1uF  [0402-TIGHT]  40.39,90.66 0 top
C267  0.1uF  [0402-TIGHT]  25.15,106.71 180 top
C268  0.1uF  [0402-TIGHT]  32.77,113.28 180 top
C269  0.1uF  [0402-TIGHT]  54.16,97.53 180 top
C270  0.1uF  [0402-TIGHT]  39.94,114.11 180 top
C271  4.7uF  [0402-TIGHT]  53.47,102.87 0 top
C272  10nF  [0402-TIGHT]  25.1,92.14 180 top
C273  0.1uF  [0402-TIGHT]  70.61,132.46 90 top
C274  0.1uF  [0402-TIGHT]  70.61,135.76 90 top
C275  0.1uF  [0402-TIGHT]  64.52,152.53 90 top
C276  0.1uF  [0402-TIGHT]  64.52,149.99 90 top
C277  0.1uF  [0402-TIGHT]  64.52,147.57 90 top
C278  0.1uF  [0402-TIGHT]  71.12,144.4 180 top
C279  0.1uF  [0402-TIGHT]  71.13,143.09 180 top
C280  0.1uF  [0402-TIGHT]  71.12,137.67 180 top
C281  0.1uF  [0402-TIGHT]  71.12,134.24 180 top
C282  0.1uF  [0402-TIGHT]  71.12,130.94 180 top
C283  0.1uF  [0402-TIGHT]  57.61,137.66 270 top
C284  0.1uF  [0402-TIGHT]  55.28,134.98 0 top
C285  0.1uF  [0402-TIGHT]  43.23,132.85 90 top
C286  1.0uF  [0402-TIGHT]  53.87,136.88 315 top
C287  0.1uF  [0402-TIGHT]  53.17,136.2 315 top
C288  1.0uF  [0402-TIGHT]  42.27,132.85 90 top
C289  1.0uF  [0402-TIGHT]  62.74,130.05 90 top
C290  100pF  [0402-TIGHT]  60.2,130.56 180 top
C291  100pF  [0402-TIGHT]  60.2,140.72 180 top
C292  1.0uF  [0402-TIGHT]  65.53,129.54 0 top
C293  100pF  [0402-TIGHT]  66.55,130.56 0 top
C294  100pF  [0402-TIGHT]  66.55,140.72 0 top
C295  1.0uF  [0402-TIGHT]  50.29,139.06 90 top
C296  1.0uF  [0402-TIGHT]  51.31,139.06 90 top
C297  1.0uF  [0402-TIGHT]  48.26,139.06 90 top
C298  1.0uF  [0402-TIGHT]  49.28,139.06 90 top
C299  0.1uF  [0402-TIGHT]  63.88,140.84 0 top
C300  1.0uF  [0402-TIGHT]  63.88,141.86 0 top
C301  5.6nF  [0603]  46.94,138.91 90 top
C302  390nF  [0603]  45.47,138.91 90 top
C303  0.1uF  [0402-TIGHT]  44.55,127.48 135 top
C304  1.0uF  [0402-TIGHT]  43.81,126.77 135 top
C305  22uF  [0805]  73.03,131.95 90 top
C306  22uF  [0805]  73.03,135.25 90 top
C307  22uF  [0805]  73.03,138.68 270 top
C308  22uF  [0805]  73.03,141.99 270 top
C309  22uF  [0805]  73.03,145.41 90 top
C310  22uF  [0805]  66.67,147.83 0 top
C311  22uF  [0805]  66.67,149.86 0 top
C312  22uF  [0805]  66.67,152.4 0 top
C313  12pF  [0402-TIGHT]  128.88,109.59 0 top
C314  12pF  [0402-TIGHT]  129.67,103.22 180 top
C315  0.1uF  [0402-TIGHT]  126.25,113.45 270 top
C316  0.1uF  [0402-TIGHT]  122.32,115.54 180 top
C317  0.1uF  [0402-TIGHT]  121.61,111.33 0 top
C318  2.2uF  [0603]  121.16,113.45 90 top
C319  10uF  [0402-TIGHT]  119.2,115.31 180 top
C320  0.1uF  [0402-TIGHT]  136.91,118.87 180 top
C321  10uF  [0402-TIGHT]  136.78,121.41 180 top
C322  0.1uF  [0402-TIGHT]  136.78,95.63 180 top
C323  10uF  [0402-TIGHT]  136.91,98.81 180 top
C324  10uF  [0402-TIGHT]  96.52,114.55 270 top
C325  0.1uF  [0402-TIGHT]  123.65,136.29 225 top
C326  1.0uF  [0402-TIGHT]  122.99,136.96 225 top
C327  0.1uF  [0402-TIGHT]  133.71,133.27 90 top
C328  1.0uF  [0402-TIGHT]  134.65,133.27 90 top
C329  0.1uF  [0402-TIGHT]  141.73,152.53 90 top
C330  0.1uF  [0402-TIGHT]  141.73,149.99 90 top
C331  0.1uF  [0402-TIGHT]  141.73,147.57 90 top
C332  0.1uF  [0402-TIGHT]  149.86,145.92 90 top
C333  0.1uF  [0402-TIGHT]  150.37,140.97 180 top
C334  0.1uF  [0402-TIGHT]  149.86,139.19 90 top
C335  0.1uF  [0402-TIGHT]  97.79,114.55 270 top
C336  10pF  [0603]  134.36,108.04 0 top
C337  0.1uF  [0402-TIGHT]  112.36,116.78 180 top
C338  10uF  [0402-TIGHT]  139.93,87.94 0 top
C339  0.1uF  [0402-TIGHT]  114.11,113.4 90 top
C340  0.1uF  [0402-TIGHT]  110.24,111.51 180 top
C341  0.1uF  [0402-TIGHT]  104.9,101.09 180 top
C342  0.1uF  [0402-TIGHT]  126.2,94.61 270 top
C343  0.1uF  [0402-TIGHT]  126.87,98.08 0 top
C344  0.1uF  [0402-TIGHT]  119.64,90.66 0 top
C345  0.1uF  [0402-TIGHT]  104.4,106.71 180 top
C346  0.1uF  [0402-TIGHT]  112.01,113.28 180 top
C347  0.1uF  [0402-TIGHT]  133.41,97.53 180 top
C348  0.1uF  [0402-TIGHT]  119.19,114.11 180 top
C349  4.7uF  [0402-TIGHT]  132.72,102.87 0 top
C350  10nF  [0402-TIGHT]  104.35,92.14 180 top
C351  0.1uF  [0402-TIGHT]  149.86,132.46 90 top
C352  0.1uF  [0402-TIGHT]  149.86,135.76 90 top
C353  0.1uF  [0402-TIGHT]  143.76,152.53 90 top
C354  0.1uF  [0402-TIGHT]  143.76,149.99 90 top
C355  0.1uF  [0402-TIGHT]  143.76,147.57 90 top
C356  0.1uF  [0402-TIGHT]  150.37,144.4 180 top
C357  0.1uF  [0402-TIGHT]  150.38,143.09 180 top
C358  0.1uF  [0402-TIGHT]  150.37,137.67 180 top
C359  0.1uF  [0402-TIGHT]  150.37,134.24 180 top
C360  0.1uF  [0402-TIGHT]  150.37,130.94 180 top
C361  0.1uF  [0402-TIGHT]  136.86,137.66 270 top
C362  0.1uF  [0402-TIGHT]  134.53,134.98 0 top
C363  0.1uF  [0402-TIGHT]  122.48,132.85 90 top
C364  1.0uF  [0402-TIGHT]  133.12,136.88 315 top
C365  0.1uF  [0402-TIGHT]  132.42,136.2 315 top
C366  1.0uF  [0402-TIGHT]  121.51,132.85 90 top
C367  1.0uF  [0402-TIGHT]  141.99,130.05 90 top
C368  100pF  [0402-TIGHT]  139.45,130.56 180 top
C369  100pF  [0402-TIGHT]  139.45,140.72 180 top
C370  1.0uF  [0402-TIGHT]  144.78,129.54 0 top
C371  100pF  [0402-TIGHT]  145.8,130.56 0 top
C372  100pF  [0402-TIGHT]  145.8,140.72 0 top
C373  1.0uF  [0402-TIGHT]  129.54,139.06 90 top
C374  1.0uF  [0402-TIGHT]  130.56,139.06 90 top
C375  1.0uF  [0402-TIGHT]  127.51,139.06 90 top
C376  1.0uF  [0402-TIGHT]  128.52,139.06 90 top
C377  0.1uF  [0402-TIGHT]  143.13,140.84 0 top
C378  1.0uF  [0402-TIGHT]  143.13,141.86 0 top
C379  5.6nF  [0603]  126.19,138.91 90 top
C380  390nF  [0603]  124.71,138.91 90 top
C381  0.1uF  [0402-TIGHT]  123.8,127.48 135 top
C382  1.0uF  [0402-TIGHT]  123.06,126.77 135 top
C383  22uF  [0805]  152.27,131.95 90 top
C384  22uF  [0805]  152.27,135.25 90 top
C385  22uF  [0805]  152.27,138.68 270 top
C386  22uF  [0805]  152.27,141.99 270 top
C387  22uF  [0805]  152.27,145.41 90 top
C388  22uF  [0805]  145.92,147.83 0 top
C389  22uF  [0805]  145.92,149.86 0 top
C390  22uF  [0805]  145.92,152.4 0 top
C391  12pF  [0402-TIGHT]  208.13,109.59 0 top
C392  12pF  [0402-TIGHT]  208.92,103.22 180 top
C393  0.1uF  [0402-TIGHT]  205.5,113.45 270 top
C394  0.1uF  [0402-TIGHT]  201.57,115.54 180 top
C395  0.1uF  [0402-TIGHT]  200.86,111.33 0 top
C396  2.2uF  [0603]  200.41,113.45 90 top
C397  10uF  [0402-TIGHT]  198.45,115.31 180 top
C398  0.1uF  [0402-TIGHT]  216.15,118.87 180 top
C399  10uF  [0402-TIGHT]  216.03,121.41 180 top
C400  0.1uF  [0402-TIGHT]  216.03,95.63 180 top
C401  10uF  [0402-TIGHT]  216.15,98.81 180 top
C402  10uF  [0402-TIGHT]  175.77,114.55 270 top
C403  0.1uF  [0402-TIGHT]  202.9,136.29 225 top
C404  1.0uF  [0402-TIGHT]  202.23,136.96 225 top
C405  0.1uF  [0402-TIGHT]  212.95,133.27 90 top
C406  1.0uF  [0402-TIGHT]  213.89,133.27 90 top
C407  0.1uF  [0402-TIGHT]  220.98,152.53 90 top
C408  0.1uF  [0402-TIGHT]  220.98,149.99 90 top
C409  0.1uF  [0402-TIGHT]  220.98,147.57 90 top
C410  0.1uF  [0402-TIGHT]  229.11,145.92 90 top
C411  0.1uF  [0402-TIGHT]  229.62,140.97 180 top
C412  0.1uF  [0402-TIGHT]  229.11,139.19 90 top
C413  0.1uF  [0402-TIGHT]  177.04,114.55 270 top
C414  10pF  [0603]  213.61,108.04 0 top
C415  0.1uF  [0402-TIGHT]  191.6,116.78 180 top
C416  10uF  [0402-TIGHT]  219.18,87.94 0 top
C417  0.1uF  [0402-TIGHT]  193.35,113.4 90 top
C418  0.1uF  [0402-TIGHT]  189.48,111.51 180 top
C419  0.1uF  [0402-TIGHT]  184.15,101.09 180 top
C420  0.1uF  [0402-TIGHT]  205.45,94.61 270 top
C421  0.1uF  [0402-TIGHT]  206.12,98.08 0 top
C422  0.1uF  [0402-TIGHT]  198.89,90.66 0 top
C423  0.1uF  [0402-TIGHT]  183.64,106.71 180 top
C424  0.1uF  [0402-TIGHT]  191.26,113.28 180 top
C425  0.1uF  [0402-TIGHT]  212.66,97.53 180 top
C426  0.1uF  [0402-TIGHT]  198.44,114.11 180 top
C427  4.7uF  [0402-TIGHT]  211.97,102.87 0 top
C428  10nF  [0402-TIGHT]  183.6,92.14 180 top
C429  0.1uF  [0402-TIGHT]  229.11,132.46 90 top
C430  0.1uF  [0402-TIGHT]  229.11,135.76 90 top
C431  0.1uF  [0402-TIGHT]  223.01,152.53 90 top
C432  0.1uF  [0402-TIGHT]  223.01,149.99 90 top
C433  0.1uF  [0402-TIGHT]  223.01,147.57 90 top
C434  0.1uF  [0402-TIGHT]  229.62,144.4 180 top
C435  0.1uF  [0402-TIGHT]  229.63,143.09 180 top
C436  0.1uF  [0402-TIGHT]  229.62,137.67 180 top
C437  0.1uF  [0402-TIGHT]  229.62,134.24 180 top
C438  0.1uF  [0402-TIGHT]  229.62,130.94 180 top
C439  0.1uF  [0402-TIGHT]  216.1,137.66 270 top
C440  0.1uF  [0402-TIGHT]  213.77,134.98 0 top
C441  0.1uF  [0402-TIGHT]  201.73,132.85 90 top
C442  1.0uF  [0402-TIGHT]  212.36,136.88 315 top
C443  0.1uF  [0402-TIGHT]  211.67,136.2 315 top
C444  1.0uF  [0402-TIGHT]  200.76,132.85 90 top
C445  1.0uF  [0402-TIGHT]  221.23,130.05 90 top
C446  100pF  [0402-TIGHT]  218.69,130.56 180 top
C447  100pF  [0402-TIGHT]  218.69,140.72 180 top
C448  1.0uF  [0402-TIGHT]  224.03,129.54 0 top
C449  100pF  [0402-TIGHT]  225.04,130.56 0 top
C450  100pF  [0402-TIGHT]  225.04,140.72 0 top
C451  1.0uF  [0402-TIGHT]  208.79,139.06 90 top
C452  1.0uF  [0402-TIGHT]  209.8,139.06 90 top
C453  1.0uF  [0402-TIGHT]  206.76,139.06 90 top
C454  1.0uF  [0402-TIGHT]  207.77,139.06 90 top
C455  0.1uF  [0402-TIGHT]  222.38,140.84 0 top
C456  1.0uF  [0402-TIGHT]  222.38,141.86 0 top
C457  5.6nF  [0603]  205.44,138.91 90 top
C458  390nF  [0603]  203.96,138.91 90 top
C459  0.1uF  [0402-TIGHT]  203.05,127.48 135 top
C460  1.0uF  [0402-TIGHT]  202.31,126.77 135 top
C461  22uF  [0805]  231.52,131.95 90 top
C462  22uF  [0805]  231.52,135.25 90 top
C463  22uF  [0805]  231.52,138.68 270 top
C464  22uF  [0805]  231.52,141.99 270 top
C465  22uF  [0805]  231.52,145.41 90 top
C466  22uF  [0805]  225.17,147.83 0 top
C467  22uF  [0805]  225.17,149.86 0 top
C468  22uF  [0805]  225.17,152.4 0 top
D1  1A/40V/500mV  [SMA-DIODE]  60.2,17.53 90 top
D2  1A/40V/500mV  [SMA-DIODE]  139.45,17.53 90 top
D3  1A/40V/500mV  [SMA-DIODE]  28.7,70.61 0 top
D4  RGB  [P-LCC-4-3]  14.48,58.93 180 top
D5  1A/40V/500mV  [SMA-DIODE]  107.95,70.61 0 top
D6  RGB  [P-LCC-4-3]  93.73,58.93 180 top
D7  1A/40V/500mV  [SMA-DIODE]  218.69,17.53 90 top
D8  1A/40V/500mV  [SMA-DIODE]  187.2,70.61 0 top
D9  RGB  [P-LCC-4-3]  172.97,58.93 180 top
D10  1A/40V/500mV  [SMA-DIODE]  60.2,91.69 90 top
D11  1A/40V/500mV  [SMA-DIODE]  28.7,144.78 0 top
D12  RGB  [P-LCC-4-3]  14.48,133.1 180 top
D13  1A/40V/500mV  [SMA-DIODE]  139.45,91.69 90 top
D14  1A/40V/500mV  [SMA-DIODE]  107.95,144.78 0 top
D15  RGB  [P-LCC-4-3]  93.73,133.1 180 top
D16  1A/40V/500mV  [SMA-DIODE]  218.69,91.69 90 top
D17  1A/40V/500mV  [SMA-DIODE]  187.2,144.78 0 top
D18  RGB  [P-LCC-4-3]  172.97,133.1 180 top
E$1  [FIDUCIAL-1X2]  21.34,156.78 0 top
E$2  [FIDUCIAL-1X2]  21.34,156.78 0 bottom
E$3  [FIDUCIAL-1X2]  240.47,156.78 0 top
E$4  [FIDUCIAL-1X2]  240.47,156.78 0 bottom
E$5  [FIDUCIAL-1.5X3]  21.34,4.76 0 top
E$6  [FIDUCIAL-1.5X3]  21.34,4.76 0 bottom
FB1  470Ω  [0603]  45.46,39.25 270 top
FB2  470Ω  [0603]  43.65,39.26 270 top
FB3  470Ω  [0603]  32.77,41.15 0 top
FB4  600Ω  [0805]  62.74,40.51 90 top
FB5  600Ω  [0805]  60.65,40.49 90 top
FB6  470Ω  [0603]  124.71,39.25 270 top
FB7  470Ω  [0603]  122.9,39.26 270 top
FB8  470Ω  [0603]  112.01,41.15 0 top
FB9  600Ω  [0805]  139.9,40.49 90 top
FB10  600Ω  [0805]  141.99,40.51 90 top
FB11  470Ω  [0603]  203.96,39.25 270 top
FB12  470Ω  [0603]  202.15,39.26 270 top
FB13  470Ω  [0603]  191.26,41.15 0 top
FB14  600Ω  [0805]  219.15,40.49 90 top
FB15  600Ω  [0805]  221.23,40.51 90 top
FB16  470Ω  [0603]  45.46,113.42 270 top
FB17  470Ω  [0603]  43.65,113.43 270 top
FB18  470Ω  [0603]  32.77,115.32 0 top
FB19  600Ω  [0805]  60.65,114.66 90 top
FB20  600Ω  [0805]  62.74,114.68 90 top
FB21  470Ω  [0603]  124.71,113.42 270 top
FB22  470Ω  [0603]  122.9,113.43 270 top
FB23  470Ω  [0603]  112.01,115.32 0 top
FB24  600Ω  [0805]  139.9,114.66 90 top
FB25  600Ω  [0805]  141.99,114.68 90 top
FB26  470Ω  [0603]  203.96,113.42 270 top
FB27  470Ω  [0603]  202.15,113.43 270 top
FB28  470Ω  [0603]  191.26,115.32 0 top
FB29  600Ω  [0805]  219.15,114.66 90 top
FB30  600Ω  [0805]  221.23,114.68 90 top
FD1  FIDUCIALUFIDUCIAL  [FIDUCIAL-MICRO]  80.52,8.13 0 top
FD2  FIDUCIALUFIDUCIAL  [FIDUCIAL-MICRO]  13.21,74.17 0 top
FD3  FIDUCIALUFIDUCIAL  [FIDUCIAL-MICRO]  13.21,74.17 0 bottom
FD4  FIDUCIALUFIDUCIAL  [FIDUCIAL-MICRO]  80.52,8.13 0 bottom
FD5  FIDUCIALUFIDUCIAL  [FIDUCIAL-MICRO]  159.77,8.13 0 top
FD6  FIDUCIALUFIDUCIAL  [FIDUCIAL-MICRO]  92.46,74.17 0 top
FD7  FIDUCIALUFIDUCIAL  [FIDUCIAL-MICRO]  92.46,74.17 0 bottom
FD8  FIDUCIALUFIDUCIAL  [FIDUCIAL-MICRO]  159.77,8.13 0 bottom
FD9  FIDUCIALUFIDUCIAL  [FIDUCIAL-MICRO]  239.01,8.13 0 top
FD10  FIDUCIALUFIDUCIAL  [FIDUCIAL-MICRO]  171.7,74.17 0 top
FD11  FIDUCIALUFIDUCIAL  [FIDUCIAL-MICRO]  171.7,74.17 0 bottom
FD12  FIDUCIALUFIDUCIAL  [FIDUCIAL-MICRO]  239.01,8.13 0 bottom
FD13  FIDUCIALUFIDUCIAL  [FIDUCIAL-MICRO]  80.52,82.3 0 top
FD14  FIDUCIALUFIDUCIAL  [FIDUCIAL-MICRO]  13.21,148.34 0 top
FD15  FIDUCIALUFIDUCIAL  [FIDUCIAL-MICRO]  13.21,148.34 0 bottom
FD16  FIDUCIALUFIDUCIAL  [FIDUCIAL-MICRO]  80.52,82.3 0 bottom
FD17  FIDUCIALUFIDUCIAL  [FIDUCIAL-MICRO]  159.77,82.3 0 top
FD18  FIDUCIALUFIDUCIAL  [FIDUCIAL-MICRO]  92.46,148.34 0 top
FD19  FIDUCIALUFIDUCIAL  [FIDUCIAL-MICRO]  92.46,148.34 0 bottom
FD20  FIDUCIALUFIDUCIAL  [FIDUCIAL-MICRO]  159.77,82.3 0 bottom
FD21  FIDUCIALUFIDUCIAL  [FIDUCIAL-MICRO]  239.01,82.3 0 top
FD22  FIDUCIALUFIDUCIAL  [FIDUCIAL-MICRO]  171.7,148.34 0 top
FD23  FIDUCIALUFIDUCIAL  [FIDUCIAL-MICRO]  171.7,148.34 0 bottom
FD24  FIDUCIALUFIDUCIAL  [FIDUCIAL-MICRO]  239.01,82.3 0 bottom
H1  STAND-OFF  [STAND-OFF]  14.48,76.71 0 top
H2  STAND-OFF  [STAND-OFF]  71.63,10.67 0 top
H3  STAND-OFF  [STAND-OFF]  14.48,10.67 0 top
H4  STAND-OFF  [STAND-OFF]  71.63,76.71 0 top
H5  STAND-OFF  [STAND-OFF]  93.73,10.67 0 top
H6  STAND-OFF  [STAND-OFF]  93.73,76.71 0 top
H7  STAND-OFF  [STAND-OFF]  150.88,10.67 0 top
H8  STAND-OFF  [STAND-OFF]  150.88,76.71 0 top
H9  STAND-OFF  [STAND-OFF]  172.97,10.67 0 top
H10  STAND-OFF  [STAND-OFF]  172.97,76.71 0 top
H11  STAND-OFF  [STAND-OFF]  230.12,10.67 0 top
H12  STAND-OFF  [STAND-OFF]  230.12,76.71 0 top
H13  STAND-OFF  [STAND-OFF]  14.48,84.84 0 top
H14  STAND-OFF  [STAND-OFF]  14.48,150.88 0 top
H15  STAND-OFF  [STAND-OFF]  71.63,84.84 0 top
H16  STAND-OFF  [STAND-OFF]  71.63,150.88 0 top
H17  STAND-OFF  [STAND-OFF]  93.73,84.84 0 top
H18  STAND-OFF  [STAND-OFF]  93.73,150.88 0 top
H19  STAND-OFF  [STAND-OFF]  150.88,84.84 0 top
H20  STAND-OFF  [STAND-OFF]  150.88,150.88 0 top
H21  STAND-OFF  [STAND-OFF]  172.97,84.84 0 top
H22  STAND-OFF  [STAND-OFF]  172.97,150.88 0 top
H23  STAND-OFF  [STAND-OFF]  230.12,84.84 0 top
H24  STAND-OFF  [STAND-OFF]  230.12,150.88 0 top
I2C  [SMT-JUMPER_3_2-NC_TRACE_SILK]  51.82,18.41 0 bottom
I2C1  [SMT-JUMPER_3_2-NC_TRACE_SILK]  131.07,18.41 0 bottom
I2C2  [SMT-JUMPER_3_2-NC_TRACE_SILK]  210.32,18.41 0 bottom
I2C3  [SMT-JUMPER_3_2-NC_TRACE_SILK]  51.82,92.58 0 bottom
I2C4  [SMT-JUMPER_3_2-NC_TRACE_SILK]  131.07,92.58 0 bottom
I2C5  [SMT-JUMPER_3_2-NC_TRACE_SILK]  210.32,92.58 0 bottom
J1  VDC-IN  [1X02_NO_SILK]  64.01,8.13 90 top
J2  GND-IN  [1X02_NO_SILK]  61.47,8.13 90 top
J3  DEBUG  [1X01_NO_SILK]  45.21,19.05 0 top
J4  QWIIC  [JST04_1MM_RA]  54.81,11.84 0 top
J5  AUDIO I/O  [2X10_NOSILK]  158.5,76.71 270 top
J6  3.3VA  [1X01_NO_SILK]  70.36,44.96 0 top
J7  3.3V  [1X01_NO_SILK]  69.09,22.1 0 top
J8  PLAYING  [1X01_NO_SILK]  27.18,35.05 0 top
J9  CORTEX_JTAG_DEBUG_PTH_NS  [2X5-PTH-1.27MM-NO_SILK]  47.5,13.21 0 top
J10  TRIG2  [2X8_NOSILK]  79.25,48.77 270 top
J11  TRIG1  [2X8_NOSILK]  79.25,28.45 270 top
J12  3.3VA  [1X01_NO_SILK]  149.61,44.96 0 top
J13  [2X5_NOSILK]  52.58,47.5 0 bottom
J14  AUDIO I/O  [2X10_NOSILK]  79.25,76.71 270 top
J15  MIDI  [1X05_NO_SILK]  25.91,79.25 0 top
J16  USB-C  [USB-C-16P-4LAYER-ISOLATED]  17.02,27.94 270 top
J17  AGND  [1X01_NO_SILK]  42.42,70.36 90 top
J18  [6_PIN_SERIAL_TARGET_SIDE_W_SILK]  29.72,8.13 0 top
J19  3.3V  [1X01_NO_SILK]  148.34,22.1 0 top
J20  TRIG2  [2X8_NOSILK]  158.5,48.77 270 top
J21  TRIG1  [2X8_NOSILK]  158.5,28.45 270 top
J22  MIDI  [1X05_NO_SILK]  105.16,79.25 0 top
J23  DEBUG  [1X01_NO_SILK]  124.46,19.05 0 top
J24  PLAYING  [1X01_NO_SILK]  106.43,35.05 0 top
J25  VDC-IN  [1X02_NO_SILK]  143.26,8.13 90 top
J26  GND-IN  [1X02_NO_SILK]  140.72,8.13 90 top
J27  USB-C  [USB-C-16P-4LAYER-ISOLATED]  96.27,27.94 270 top
J28  QWIIC  [JST04_1MM_RA]  134.06,11.84 0 top
J29  AGND  [1X01_NO_SILK]  121.67,70.36 90 top
J30  [2X5_NOSILK]  131.83,47.5 0 bottom
J31  [6_PIN_SERIAL_TARGET_SIDE_W_SILK]  108.97,8.13 0 top
J32  CORTEX_JTAG_DEBUG_PTH_NS  [2X5-PTH-1.27MM-NO_SILK]  126.75,13.21 0 top
J33  AUDIO I/O  [2X10_NOSILK]  237.74,76.71 270 top
J34  3.3VA  [1X01_NO_SILK]  228.85,44.96 0 top
J35  3.3V  [1X01_NO_SILK]  227.58,22.1 0 top
J36  TRIG2  [2X8_NOSILK]  237.74,48.77 270 top
J37  TRIG1  [2X8_NOSILK]  237.74,28.45 270 top
J38  MIDI  [1X05_NO_SILK]  184.4,79.25 0 top
J39  DEBUG  [1X01_NO_SILK]  203.71,19.05 0 top
J40  PLAYING  [1X01_NO_SILK]  185.67,35.05 0 top
J41  VDC-IN  [1X02_NO_SILK]  222.5,8.13 90 top
J42  GND-IN  [1X02_NO_SILK]  219.96,8.13 90 top
J43  USB-C  [USB-C-16P-4LAYER-ISOLATED]  175.51,27.94 270 top
J44  QWIIC  [JST04_1MM_RA]  213.31,11.84 0 top
J45  AGND  [1X01_NO_SILK]  200.91,70.36 90 top
J46  [2X5_NOSILK]  211.07,47.5 0 bottom
J47  [6_PIN_SERIAL_TARGET_SIDE_W_SILK]  188.21,8.13 0 top
J48  CORTEX_JTAG_DEBUG_PTH_NS  [2X5-PTH-1.27MM-NO_SILK]  205.99,13.21 0 top
J49  AUDIO I/O  [2X10_NOSILK]  79.25,150.88 270 top
J50  3.3VA  [1X01_NO_SILK]  70.36,119.13 0 top
J51  3.3V  [1X01_NO_SILK]  69.09,96.27 0 top
J52  TRIG2  [2X8_NOSILK]  79.25,122.94 270 top
J53  TRIG1  [2X8_NOSILK]  79.25,102.62 270 top
J54  MIDI  [1X05_NO_SILK]  25.91,153.42 0 top
J55  DEBUG  [1X01_NO_SILK]  45.21,93.22 0 top
J56  PLAYING  [1X01_NO_SILK]  27.18,109.22 0 top
J57  VDC-IN  [1X02_NO_SILK]  64.01,82.3 90 top
J58  GND-IN  [1X02_NO_SILK]  61.47,82.3 90 top
J59  USB-C  [USB-C-16P-4LAYER-ISOLATED]  17.02,102.11 270 top
J60  QWIIC  [JST04_1MM_RA]  54.81,86 0 top
J61  AGND  [1X01_NO_SILK]  42.42,144.53 90 top
J62  [2X5_NOSILK]  52.58,121.67 0 bottom
J63  [6_PIN_SERIAL_TARGET_SIDE_W_SILK]  29.72,82.3 0 top
J64  CORTEX_JTAG_DEBUG_PTH_NS  [2X5-PTH-1.27MM-NO_SILK]  47.5,87.38 0 top
J65  AUDIO I/O  [2X10_NOSILK]  158.5,150.88 270 top
J66  3.3VA  [1X01_NO_SILK]  149.61,119.13 0 top
J67  3.3V  [1X01_NO_SILK]  148.34,96.27 0 top
J68  TRIG2  [2X8_NOSILK]  158.5,122.94 270 top
J69  TRIG1  [2X8_NOSILK]  158.5,102.62 270 top
J70  MIDI  [1X05_NO_SILK]  105.16,153.42 0 top
J71  DEBUG  [1X01_NO_SILK]  124.46,93.22 0 top
J72  PLAYING  [1X01_NO_SILK]  106.43,109.22 0 top
J73  VDC-IN  [1X02_NO_SILK]  143.26,82.3 90 top
J74  GND-IN  [1X02_NO_SILK]  140.72,82.3 90 top
J75  USB-C  [USB-C-16P-4LAYER-ISOLATED]  96.27,102.11 270 top
J76  QWIIC  [JST04_1MM_RA]  134.06,86 0 top
J77  AGND  [1X01_NO_SILK]  121.67,144.53 90 top
J78  [2X5_NOSILK]  131.83,121.67 0 bottom
J79  [6_PIN_SERIAL_TARGET_SIDE_W_SILK]  108.97,82.3 0 top
J80  CORTEX_JTAG_DEBUG_PTH_NS  [2X5-PTH-1.27MM-NO_SILK]  126.75,87.38 0 top
J81  AUDIO I/O  [2X10_NOSILK]  237.74,150.88 270 top
J82  3.3VA  [1X01_NO_SILK]  228.85,119.13 0 top
J83  3.3V  [1X01_NO_SILK]  227.58,96.27 0 top
J84  TRIG2  [2X8_NOSILK]  237.74,122.94 270 top
J85  TRIG1  [2X8_NOSILK]  237.74,102.62 270 top
J86  MIDI  [1X05_NO_SILK]  184.4,153.42 0 top
J87  DEBUG  [1X01_NO_SILK]  203.71,93.22 0 top
J88  PLAYING  [1X01_NO_SILK]  185.67,109.22 0 top
J89  VDC-IN  [1X02_NO_SILK]  222.5,82.3 90 top
J90  GND-IN  [1X02_NO_SILK]  219.96,82.3 90 top
J91  USB-C  [USB-C-16P-4LAYER-ISOLATED]  175.51,102.11 270 top
J92  QWIIC  [JST04_1MM_RA]  213.31,86 0 top
J93  AGND  [1X01_NO_SILK]  200.91,144.53 90 top
J94  [2X5_NOSILK]  211.07,121.67 0 bottom
J95  [6_PIN_SERIAL_TARGET_SIDE_W_SILK]  188.21,82.3 0 top
J96  CORTEX_JTAG_DEBUG_PTH_NS  [2X5-PTH-1.27MM-NO_SILK]  205.99,87.38 0 top
JP1  USD-SOCKETNEW  [MICRO-SD-SOCKET-PP]  106.17,56.13 90 top
JP2  USD-SOCKETNEW  [MICRO-SD-SOCKET-PP]  185.42,56.13 90 top
JP3  USD-SOCKETNEW  [MICRO-SD-SOCKET-PP]  26.92,130.3 90 top
JP4  USD-SOCKETNEW  [MICRO-SD-SOCKET-PP]  106.17,130.3 90 top
JP5  USD-SOCKETNEW  [MICRO-SD-SOCKET-PP]  185.42,130.3 90 top
JP7  USD-SOCKETNEW  [MICRO-SD-SOCKET-PP]  26.92,56.13 90 top
L1  10μH  [0805]  53.85,27.18 180 top
L2  10μH  [0805]  133.1,27.18 180 top
L3  10μH  [0805]  212.34,27.18 180 top
L4  10μH  [0805]  53.85,101.35 180 top
L5  10μH  [0805]  133.1,101.35 180 top
L6  10μH  [0805]  212.34,101.35 180 top
LOGO1  QWIIC_LOGO_4MM  [QWIIC_4MM]  133.96,13.67 0 top
LOGO2  SFE_LOGO_NAME_FLAME.2_INCH  [SFE_LOGO_NAME_FLAME_.2]  44.2,29.34 0 bottom
LOGO3  QWIIC_LOGO_4MM  [QWIIC_4MM]  54.71,13.67 0 top
LOGO4  SFE_LOGO_NAME_FLAME.2_INCH  [SFE_LOGO_NAME_FLAME_.2]  123.44,29.34 0 bottom
LOGO5  QWIIC_LOGO_4MM  [QWIIC_4MM]  213.21,13.67 0 top
LOGO6  SFE_LOGO_NAME_FLAME.2_INCH  [SFE_LOGO_NAME_FLAME_.2]  202.69,29.34 0 bottom
LOGO7  QWIIC_LOGO_4MM  [QWIIC_4MM]  54.71,87.83 0 top
LOGO8  SFE_LOGO_NAME_FLAME.2_INCH  [SFE_LOGO_NAME_FLAME_.2]  44.2,103.51 0 bottom
LOGO9  QWIIC_LOGO_4MM  [QWIIC_4MM]  133.96,87.83 0 top
LOGO10  SFE_LOGO_NAME_FLAME.2_INCH  [SFE_LOGO_NAME_FLAME_.2]  123.44,103.51 0 bottom
LOGO11  QWIIC_LOGO_4MM  [QWIIC_4MM]  213.21,87.83 0 top
LOGO12  SFE_LOGO_NAME_FLAME.2_INCH  [SFE_LOGO_NAME_FLAME_.2]  202.69,103.51 0 bottom
Q1  3.1A/30V/105mΩ  [SOT23-3]  64.01,17.78 180 top
Q2  3.1A/30V/105mΩ  [SOT23-3]  143.26,17.78 180 top
Q3  3.1A/30V/105mΩ  [SOT23-3]  222.5,17.78 180 top
Q4  3.1A/30V/105mΩ  [SOT23-3]  64.01,91.95 180 top
Q5  3.1A/30V/105mΩ  [SOT23-3]  143.26,91.95 180 top
Q6  3.1A/30V/105mΩ  [SOT23-3]  222.5,91.95 180 top
R1  33  [0603]  25.65,16.51 0 top
R2  1M  [0603]  67.82,19.56 180 top
R3  10k  [0402-TIGHT]  25.11,19.14 180 top
R4  10k  [0402-TIGHT]  27.29,28.66 180 top
R5  560Ω  [0402-TIGHT]  46.23,66.9 0 top
R6  100k  [0402-TIGHT]  32,12.95 270 top
R7  390  [0603]  60.2,52.32 0 top
R8  390  [0603]  60.23,29.77 0 top
R9  100k  [0402-TIGHT]  33.53,12.95 270 top
R10  100k  [0402-TIGHT]  36.07,12.95 270 top
R11  240  [0603]  66.55,52.32 0 top
R12  240  [0603]  66.58,29.77 0 top
R13  100k  [0402-TIGHT]  93.22,34.29 180 top
R14  33k  [0402-TIGHT]  60.2,57.4 180 top
R15  33k  [0402-TIGHT]  61.72,55.88 90 top
R16  2.2  [0603]  53.85,24.64 180 top
R17  5.62k  [0603]  55.14,32.13 180 top
R18  10k  [0402-TIGHT]  13.97,40 180 top
R19  100k  [0402-TIGHT]  13.97,34.29 180 top
R20  100k  [0402-TIGHT]  13.97,35.43 180 top
R21  100k  [0402-TIGHT]  13.97,37.72 180 top
R22  100k  [0402-TIGHT]  13.97,38.86 180 top
R23  10k  [0402-TIGHT]  13.97,36.58 180 top
R24  100k  [0402-TIGHT]  93.22,35.43 180 top
R25  10Ω  [0402-TIGHT]  61.47,78.36 90 top
R26  10Ω  [0402-TIGHT]  61.47,75.82 90 top
R27  10Ω  [0402-TIGHT]  61.47,73.41 90 top
R28  10Ω  [0402-TIGHT]  69.6,71.76 90 top
R29  100k  [0402-TIGHT]  93.22,37.72 180 top
R30  100k  [0402-TIGHT]  93.22,38.86 180 top
R31  10k  [0402-TIGHT]  93.22,36.58 180 top
R32  10k  [0402-TIGHT]  93.22,40 180 top
R33  5.62k  [0603]  134.39,32.13 180 top
R34  2.2  [0603]  133.1,24.64 180 top
R35  240  [0603]  145.8,52.32 0 top
R36  240  [0603]  145.83,29.77 0 top
R37  10Ω  [0402-TIGHT]  63.5,78.36 270 top
R38  10Ω  [0402-TIGHT]  63.5,75.82 270 top
R39  10Ω  [0402-TIGHT]  63.5,73.41 270 top
R40  10Ω  [0402-TIGHT]  71.63,71.76 270 top
R41  10Ω  [0402-TIGHT]  71.12,67.82 0 top
R42  10Ω  [0402-TIGHT]  71.63,65.02 270 top
R43  10Ω  [0402-TIGHT]  71.63,61.59 270 top
R44  10Ω  [0402-TIGHT]  71.63,58.29 270 top
R45  220  [0603]  32.77,70.87 270 top
R46  220  [0603]  36.83,70.87 90 top
R47  220  [0603]  34.8,70.87 270 top
R48  220  [0603]  30.99,55.37 0 top
R49  5.1k  [0402-TIGHT]  20.19,26.92 180 top
R50  5.1k  [0402-TIGHT]  20.19,30.61 180 top
R51  2.2k  [0402-TIGHT]  54,15.74 90 top
R52  2.2k  [0402-TIGHT]  55.09,15.75 90 top
R53  100  [0603]  20.83,60.4 180 top
R54  100  [0603]  20.82,57.46 180 top
R55  220  [0603]  20.83,58.93 180 top
R56  10Ω  [0402-TIGHT]  69.6,68.41 270 top
R57  10Ω  [0402-TIGHT]  69.6,65.02 90 top
R58  10Ω  [0402-TIGHT]  69.6,61.59 90 top
R59  33k  [0402-TIGHT]  60.2,65.53 180 top
R60  33k  [0402-TIGHT]  60.2,67.56 0 top
R61  33k  [0402-TIGHT]  66.55,57.4 0 top
R62  33k  [0402-TIGHT]  65.02,56.9 90 top
R63  33k  [0402-TIGHT]  66.55,65.53 0 top
R64  33k  [0402-TIGHT]  66.55,67.56 180 top
R65  10Ω  [0402-TIGHT]  69.6,58.29 90 top
R66  390  [0603]  139.45,52.32 0 top
R67  390  [0603]  139.48,29.77 0 top
R68  100k  [0402-TIGHT]  111.25,12.95 270 top
R69  100k  [0402-TIGHT]  112.78,12.95 270 top
R70  100k  [0402-TIGHT]  115.32,12.95 270 top
R71  33  [0603]  104.9,16.51 0 top
R72  10k  [0402-TIGHT]  104.35,19.14 180 top
R73  1M  [0603]  147.07,19.56 180 top
R74  10Ω  [0402-TIGHT]  142.75,78.36 270 top
R75  10Ω  [0402-TIGHT]  142.75,75.82 270 top
R76  10Ω  [0402-TIGHT]  142.75,73.41 270 top
R77  10Ω  [0402-TIGHT]  150.88,71.76 270 top
R78  10Ω  [0402-TIGHT]  150.37,67.82 0 top
R79  10Ω  [0402-TIGHT]  150.88,65.02 270 top
R80  10Ω  [0402-TIGHT]  150.88,61.59 270 top
R81  10Ω  [0402-TIGHT]  150.88,58.29 270 top
R82  220  [0603]  112.01,70.87 270 top
R83  220  [0603]  110.24,55.37 0 top
R84  220  [0603]  114.05,70.87 270 top
R85  220  [0603]  116.08,70.87 90 top
R86  5.1k  [0402-TIGHT]  99.44,26.92 180 top
R87  5.1k  [0402-TIGHT]  99.44,30.61 180 top
R88  2.2k  [0402-TIGHT]  133.25,15.74 90 top
R89  2.2k  [0402-TIGHT]  134.34,15.75 90 top
R90  100  [0603]  100.08,60.4 180 top
R91  100  [0603]  100.07,57.46 180 top
R92  220  [0603]  100.08,58.93 180 top
R93  10k  [0402-TIGHT]  106.54,28.66 180 top
R94  33k  [0402-TIGHT]  139.45,57.4 180 top
R95  33k  [0402-TIGHT]  140.97,55.88 90 top
R96  33k  [0402-TIGHT]  139.45,65.53 180 top
R97  33k  [0402-TIGHT]  139.45,67.56 0 top
R98  33k  [0402-TIGHT]  145.8,57.4 0 top
R99  33k  [0402-TIGHT]  144.27,56.9 90 top
R100  33k  [0402-TIGHT]  145.8,65.53 0 top
R101  33k  [0402-TIGHT]  145.8,67.56 180 top
R102  560Ω  [0402-TIGHT]  125.48,66.9 0 top
R103  10Ω  [0402-TIGHT]  140.72,78.36 90 top
R104  10Ω  [0402-TIGHT]  140.72,75.82 90 top
R105  10Ω  [0402-TIGHT]  140.72,73.41 90 top
R106  10Ω  [0402-TIGHT]  148.84,71.76 90 top
R107  10Ω  [0402-TIGHT]  148.85,68.41 270 top
R108  10Ω  [0402-TIGHT]  148.84,65.02 90 top
R109  10Ω  [0402-TIGHT]  148.84,61.59 90 top
R110  10Ω  [0402-TIGHT]  148.84,58.29 90 top
R111  100k  [0402-TIGHT]  172.47,34.29 180 top
R112  100k  [0402-TIGHT]  172.47,35.43 180 top
R113  100k  [0402-TIGHT]  172.47,37.72 180 top
R114  100k  [0402-TIGHT]  172.47,38.86 180 top
R115  10k  [0402-TIGHT]  172.47,36.58 180 top
R116  10k  [0402-TIGHT]  172.47,40 180 top
R117  5.62k  [0603]  213.63,32.13 180 top
R118  2.2  [0603]  212.34,24.64 180 top
R119  240  [0603]  225.04,52.32 0 top
R120  240  [0603]  225.07,29.77 0 top
R121  390  [0603]  218.69,52.32 0 top
R122  390  [0603]  218.72,29.77 0 top
R123  100k  [0402-TIGHT]  190.5,12.95 270 top
R124  100k  [0402-TIGHT]  192.02,12.95 270 top
R125  100k  [0402-TIGHT]  194.56,12.95 270 top
R126  33  [0603]  184.15,16.51 0 top
R127  10k  [0402-TIGHT]  183.6,19.14 180 top
R128  1M  [0603]  226.31,19.56 180 top
R129  10Ω  [0402-TIGHT]  222,78.36 270 top
R130  10Ω  [0402-TIGHT]  222,75.82 270 top
R131  10Ω  [0402-TIGHT]  222,73.41 270 top
R132  10Ω  [0402-TIGHT]  230.12,71.76 270 top
R133  10Ω  [0402-TIGHT]  229.62,67.82 0 top
R134  10Ω  [0402-TIGHT]  230.12,65.02 270 top
R135  10Ω  [0402-TIGHT]  230.12,61.59 270 top
R136  10Ω  [0402-TIGHT]  230.12,58.29 270 top
R137  220  [0603]  191.26,70.87 270 top
R138  220  [0603]  189.48,55.37 0 top
R139  220  [0603]  193.29,70.87 270 top
R140  220  [0603]  195.33,70.87 90 top
R141  5.1k  [0402-TIGHT]  178.69,26.92 180 top
R142  5.1k  [0402-TIGHT]  178.69,30.61 180 top
R143  2.2k  [0402-TIGHT]  212.5,15.74 90 top
R144  2.2k  [0402-TIGHT]  213.59,15.75 90 top
R145  100  [0603]  179.32,60.4 180 top
R146  100  [0603]  179.32,57.46 180 top
R147  220  [0603]  179.32,58.93 180 top
R148  10k  [0402-TIGHT]  185.79,28.66 180 top
R149  33k  [0402-TIGHT]  218.69,57.4 180 top
R150  33k  [0402-TIGHT]  220.22,55.88 90 top
R151  33k  [0402-TIGHT]  218.69,65.53 180 top
R152  33k  [0402-TIGHT]  218.69,67.56 0 top
R153  33k  [0402-TIGHT]  225.04,57.4 0 top
R154  33k  [0402-TIGHT]  223.52,56.9 90 top
R155  33k  [0402-TIGHT]  225.04,65.53 0 top
R156  33k  [0402-TIGHT]  225.04,67.56 180 top
R157  560Ω  [0402-TIGHT]  204.72,66.9 0 top
R158  10Ω  [0402-TIGHT]  219.96,78.36 90 top
R159  10Ω  [0402-TIGHT]  219.96,75.82 90 top
R160  10Ω  [0402-TIGHT]  219.96,73.41 90 top
R161  10Ω  [0402-TIGHT]  228.09,71.76 90 top
R162  10Ω  [0402-TIGHT]  228.1,68.41 270 top
R163  10Ω  [0402-TIGHT]  228.09,65.02 90 top
R164  10Ω  [0402-TIGHT]  228.09,61.59 90 top
R165  10Ω  [0402-TIGHT]  228.09,58.29 90 top
R166  100k  [0402-TIGHT]  13.97,108.46 180 top
R167  100k  [0402-TIGHT]  13.97,109.6 180 top
R168  100k  [0402-TIGHT]  13.97,111.89 180 top
R169  100k  [0402-TIGHT]  13.97,113.03 180 top
R170  10k  [0402-TIGHT]  13.97,110.74 180 top
R171  10k  [0402-TIGHT]  13.97,114.17 180 top
R172  5.62k  [0603]  55.14,106.3 180 top
R173  2.2  [0603]  53.85,98.81 180 top
R174  240  [0603]  66.55,126.49 0 top
R175  240  [0603]  66.58,103.94 0 top
R176  390  [0603]  60.2,126.49 0 top
R177  390  [0603]  60.23,103.94 0 top
R178  100k  [0402-TIGHT]  32,87.12 270 top
R179  100k  [0402-TIGHT]  33.53,87.12 270 top
R180  100k  [0402-TIGHT]  36.07,87.12 270 top
R181  33  [0603]  25.65,90.68 0 top
R182  10k  [0402-TIGHT]  25.11,93.31 180 top
R183  1M  [0603]  67.82,93.73 180 top
R184  10Ω  [0402-TIGHT]  63.5,152.53 270 top
R185  10Ω  [0402-TIGHT]  63.5,149.99 270 top
R186  10Ω  [0402-TIGHT]  63.5,147.57 270 top
R187  10Ω  [0402-TIGHT]  71.63,145.92 270 top
R188  10Ω  [0402-TIGHT]  71.12,141.99 0 top
R189  10Ω  [0402-TIGHT]  71.63,139.19 270 top
R190  10Ω  [0402-TIGHT]  71.63,135.76 270 top
R191  10Ω  [0402-TIGHT]  71.63,132.46 270 top
R192  220  [0603]  32.77,145.03 270 top
R193  220  [0603]  30.99,129.54 0 top
R194  220  [0603]  34.8,145.03 270 top
R195  220  [0603]  36.83,145.03 90 top
R196  5.1k  [0402-TIGHT]  20.19,101.09 180 top
R197  5.1k  [0402-TIGHT]  20.19,104.78 180 top
R198  2.2k  [0402-TIGHT]  54,89.91 90 top
R199  2.2k  [0402-TIGHT]  55.09,89.91 90 top
R200  100  [0603]  20.83,134.57 180 top
R201  100  [0603]  20.82,131.63 180 top
R202  220  [0603]  20.83,133.1 180 top
R203  10k  [0402-TIGHT]  27.29,102.83 180 top
R204  33k  [0402-TIGHT]  60.2,131.57 180 top